# EAGLE board design (EAGLE 6.4)
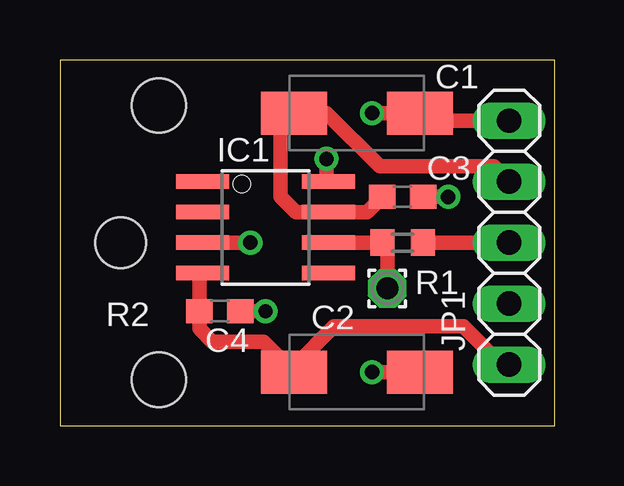
[diagram p0: board, top side]
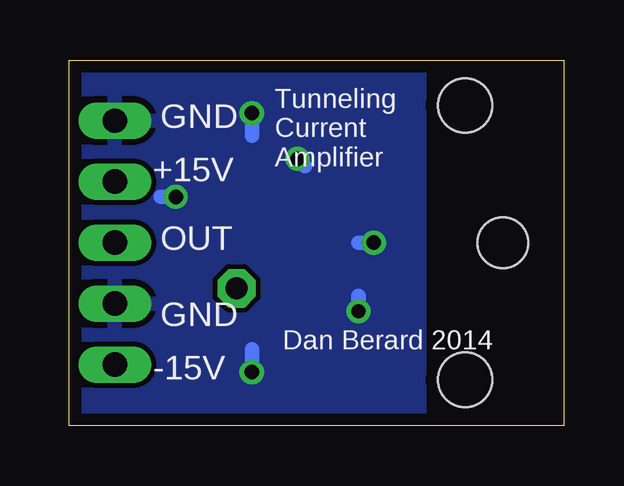
[diagram p1: board, bottom side, seen from below]

Size 20.62 x 15.23 mm. Coordinates in mm from the lower left corner, seen from the top.
Outline: 0,0 20.62,0 20.62,15.23 0,15.23 0,0
Copper layers (1*16): Top 0.035mm / dielectric 1.5mm / Bottom 0.035mm
Design rules "default *": minimum track width 10mil, minimum drill 24mil, track to track 8mil, track to pad 8mil, pad to pad 8mil, via to via 8mil, smd to smd 8mil, copper to edge 20mil, drill to drill 8mil, minimum pad ring 10mil, minimum via ring 8mil, stop-mask expansion 4mil, vias tented up to drill 0mil, thermal gap 10mil
Holes 2.11 mm at 2.54,7.62
Holes 2.26 mm at 4.13,1.91 4.13,13.34

## Footprints (pad centres in the part's own frame; a part is rotated, then mirrored left to right if it is on the bottom)
C/6032-28W = smd 2.75 x 1.8: + 2.625,0; - -2.625,0
C0603 = smd 1.1 x 1: 1 -0.85,0; 2 0.85,0
SO08 = smd 0.61 x 2.21: 1 -1.905,-2.616; 2 -0.635,-2.616; 3 0.635,-2.616; 4 1.905,-2.616; 5 1.905,2.616; 6 0.635,2.616; 7 -0.635,2.616; 8 -1.905,2.616
1X05 = drill 1.016 long: 1 -5.08,0; 2 -2.54,0; 3 0,0; 4 2.54,0; 5 5.08,0
1,6/0,9 = drill 0.914 pad 1.6 octagon: 1 0,0
R0603 = smd 1 x 1.1: 1 -0.85,0; 2 0.85,0

## Placement (x,y rotation side)
C1  4.7uF  [C/6032-28W]  12.38,13.02 180 top
C2  4.7uF  [C/6032-28W]  12.38,2.22 180 top
C3  0.1uF  [C0603]  14.29,9.53 0 top
C4  0.1uF  [C0603]  6.67,4.76 0 top
IC1  OPA124U  [SO08]  8.57,8.26 270 top
JP1  [1X05]  18.73,7.62 270 top
PAD1  [1,6/0,9]  13.65,5.71 0 top
R1  220  [R0603]  14.29,7.62 0 top

## Library data of the parts
C1-C4 R1 = resistor
IC1 = burr-brown
JP1 = pinhead
PAD1 = wirepad

## Nets
+9V: C1.+ C3.1 IC1.7 JP1.2
-9V: C2.+ C4.1 IC1.4 JP1.5
GND: C1.- C2.- C3.2 C4.2 IC1.3 IC1.8 JP1.1 JP1.4
N$1: IC1.6 PAD1.1 R1.1
N$2: JP1.3 R1.2
N$4: IC1.2

## Tracks (layer width: path | path; a pad name or v marks a point on that pad's centre or on a via)
+9V
  Top 0.61: JP1.2 18.1,10.79 13.34,10.79 11.11,13.02 C1.+ 9.21,12.47 9.21,9.53 9.84,8.89 IC1.7 12.8,8.89 C3.1
-9V
  Top 0.406: IC1.4 5.82,6.35
  Top 0.61: 5.82,6.35 C4.1 5.82,4.03 6.35,3.49 8.49,3.49 C2.+ 9.84,2.54 11.43,4.13 16.83,4.13 18.41,2.54 JP1.5
GND  (via drill 0.6)
  Top 0.61: C4.2 v8.57,4.76 | C3.2 v16.19,9.53 | IC1.3 v7.94,7.62 | C2.- v13.02,2.22 | v13.02,13.02 C1.- 15.32,12.7 19.05,12.7 | IC1.8 11.11,10.24 v11.11,11.11
  Bottom 0.61: v8.57,4.76 8.57,5.4 | v16.19,9.53 16.83,9.53 | 8.57,7.62 v7.94,7.62 | v13.02,2.22 13.02,3.17 | v13.02,13.02 13.02,12.06 | v11.11,11.11 10.79,10.79
  pour Bottom: 6.03,15.24 20.64,15.24 20.64,0 6.03,0
N$1
  Top 0.61: PAD1.1 13.65,7.41 R1.1 IC1.6
N$2
  Top 0.61: R1.2 JP1.3

## Text on the board
tNames: R2
bNames: GND | Tunneling / Current / Amplifier | +15V | OUT | GND | Dan Berard 2014 | -15V